# EAGLE board source_eagle (EAGLE 9.6.2)
REV: F
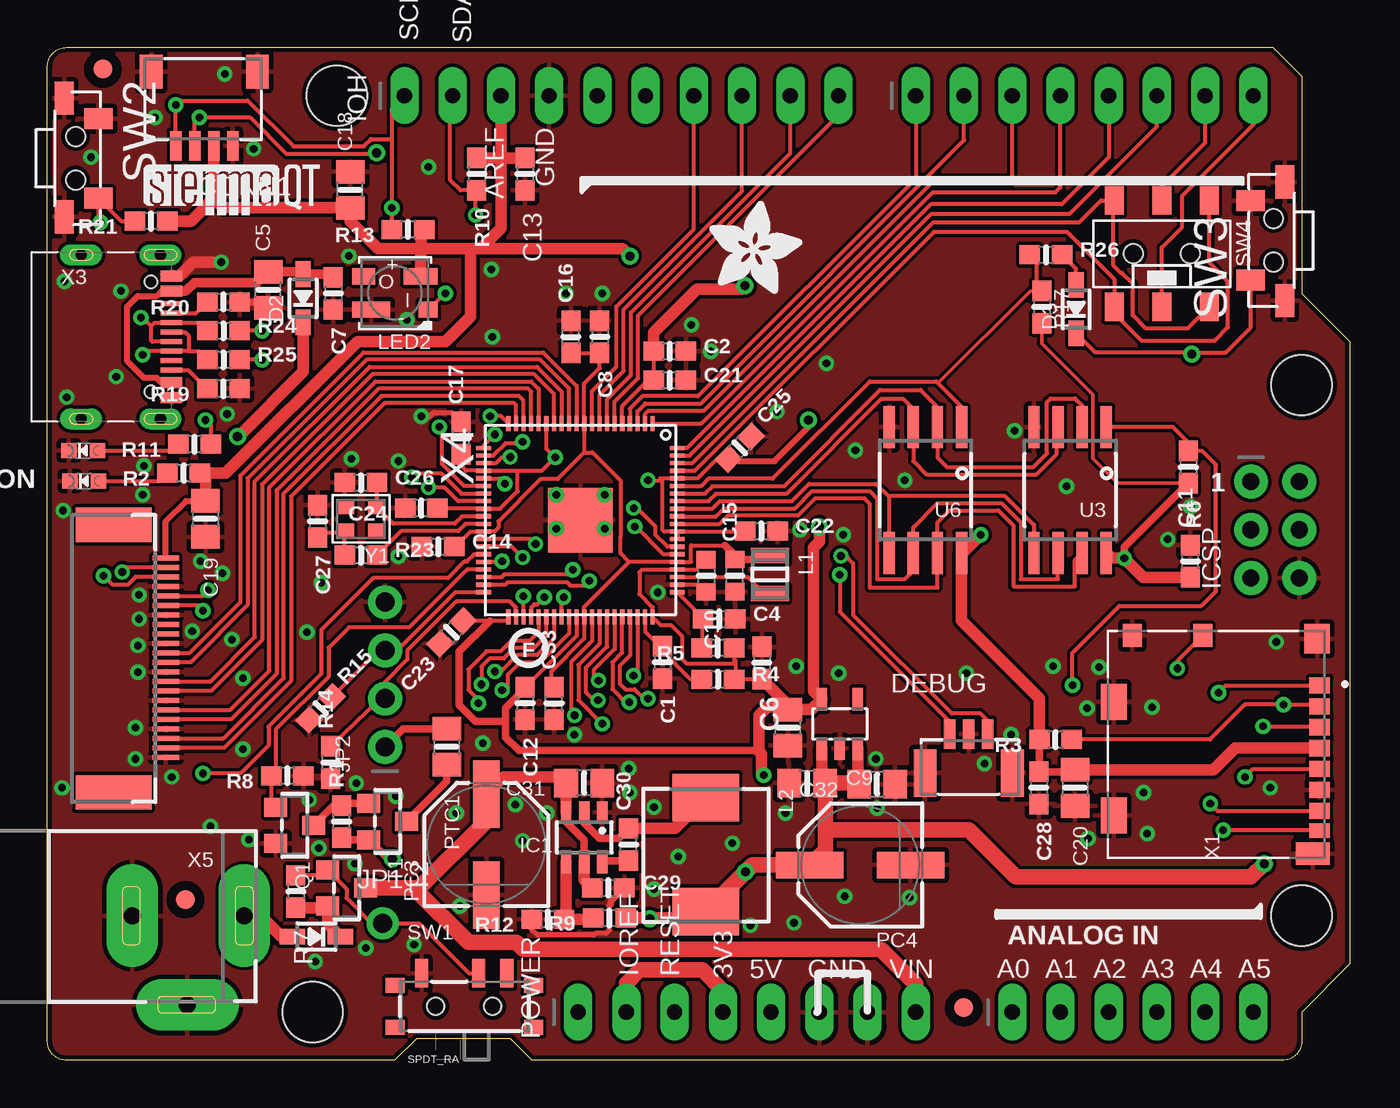
[diagram p0: board, top side]
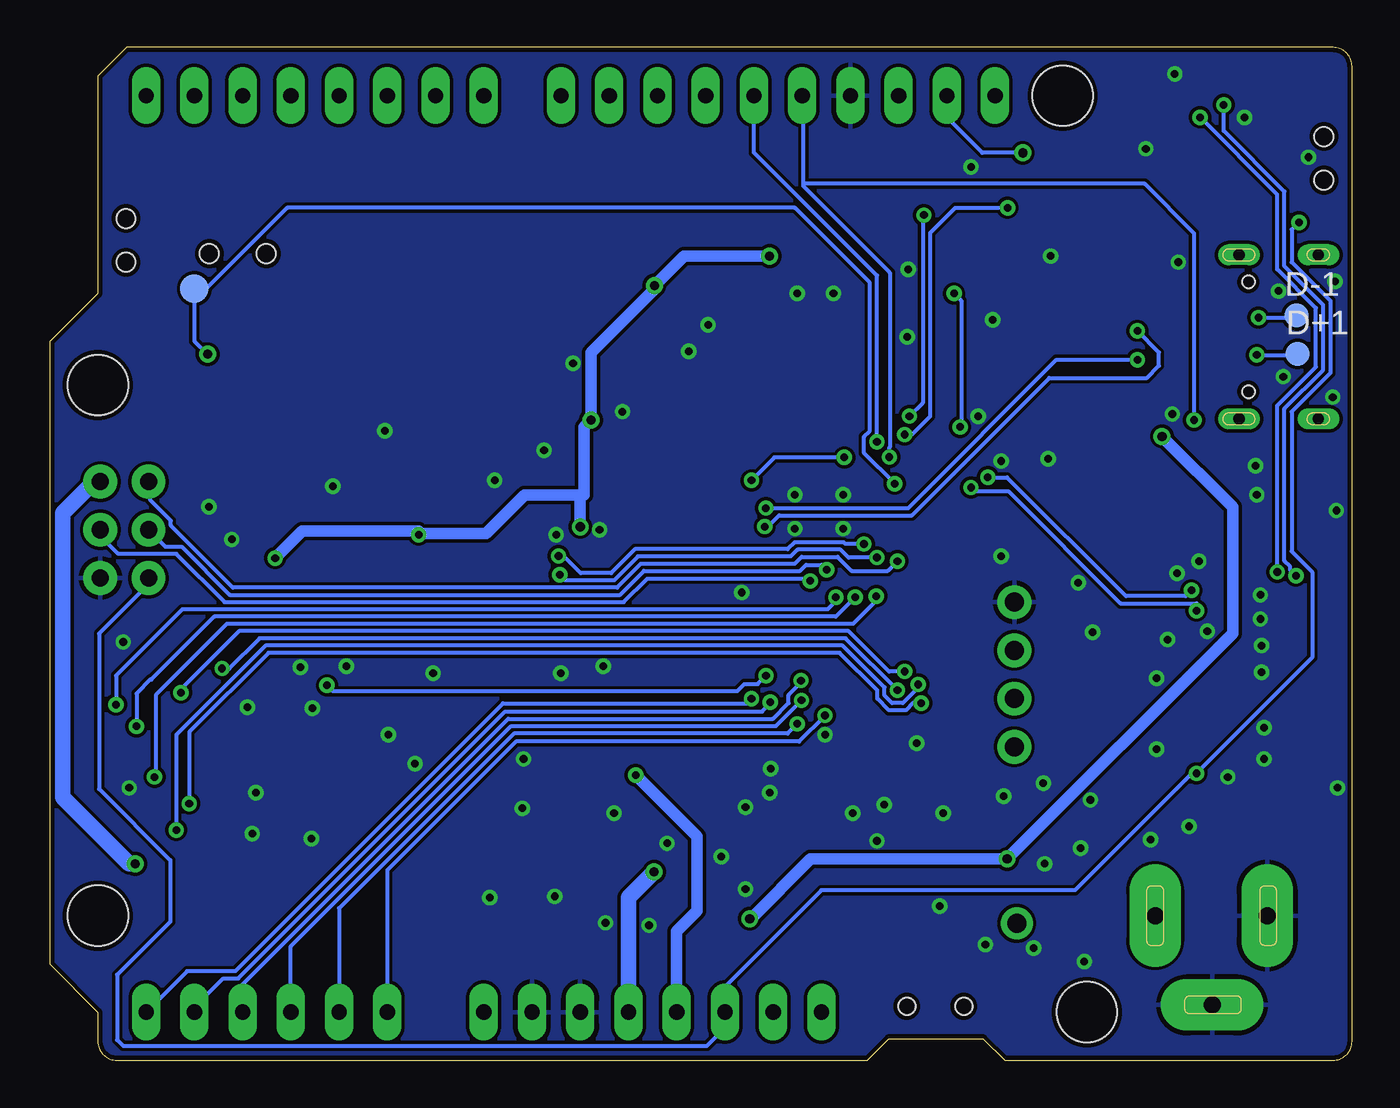
[diagram p1: board, bottom side, seen from below]

Size 68.58 x 53.34 mm. Coordinates in mm from the lower left corner, seen from the top.
Outline: 64.52,53.34 66.04,51.82 66.04,40.39 68.58,37.85 68.58,5.08 66.04,2.54 66.04,1 arc-90 65.04,0 25.53,0 24.38,1.14 19.43,1.14 18.29,0 1,0 arc-90 0,1 0,52.34 arc-90 1,53.34 64.52,53.34
Copper layers (1*16): Top 0.035mm / dielectric 1.5mm / Bottom 0.035mm
Design rules "adafruit 7-7": minimum track width 7mil, minimum drill 15.5mil, track to track 7mil, track to pad 7mil, pad to pad 7mil, via to via 7mil, smd to smd 7mil, copper to edge 10mil, drill to drill 8mil, minimum pad ring 10mil, minimum via ring 8mil, stop-mask expansion 2mil, vias tented up to drill 20mil, thermal gap 10mil
Net classes: 1 power: width 0.305 mm; 3 HIGHPOWER: width 0.254 mm, drill 0.483 mm; 4 LOWPOWER: width 0.254 mm
Holes 3.17 mm at 66.04,35.56 66.04,7.62 15.24,50.8 13.97,2.54

## Footprints (pad centres in the part's own frame; a part is rotated, then mirrored left to right if it is on the bottom)
1X06_OVALWAVE = drill 0.8 pad 1.5 long: 1 -6.35,0; 2 -3.81,0; 3 -1.27,0; 4 1.27,0; 5 3.81,0; 6 6.35,0
0603-NO = smd 1.075 x 1: 1 -0.85,0; 2 0.85,0
0805-NO = smd 1.24 x 1.5: 1 -0.95,0; 2 0.95,0
0603-NO_WIDE = smd 0.9 x 1: 1 -0.85,0; 2 0.85,0
FPC_22PIN = smd 0.25 x 1.4: 1 -5.25,-1.154; 2 -4.75,-1.154; 3 -4.25,-1.154; 4 -3.75,-1.154; 5 -3.25,-1.154; 6 -2.75,-1.154; 7 -2.25,-1.154; 8 -1.75,-1.154; 9 -1.25,-1.154; 10 -0.75,-1.154; 11 -0.25,-1.154; 12 0.25,-1.154; 13 0.75,-1.154; 14 1.25,-1.154; 15 1.75,-1.154; 16 2.25,-1.154; 17 2.75,-1.154; 18 3.25,-1.154; 19 3.75,-1.154; 20 4.25,-1.154; 21 4.75,-1.154; 22 5.25,-1.154 | smd 1.8 x 4: SUPPORT1 7,1.598; SUPPORT2 -7.1,1.598
JST_SH4 = smd 0.6 x 1.55: 1 -1.5,2.006; 2 -0.5,2.006; 3 0.5,2.006; 4 1.5,2.006 | smd 1.2 x 1.8: MT1 -2.8,-1.894; MT2 2.8,-1.894
SOD-323 = smd 1.35 x 0.8: A 1.27,0; C -1.27,0
B1,27 = smd 1.27 x 1.27: TP 0,0
JST_SH3_RA = smd 0.6 x 1.55: 1 1,0.924; 2 0,0.924; 3 -1,0.924 | smd 1.2 x 2.5: MT1 -2.3,-1.124; MT2 2.3,-1.124
FIDUCIAL_1MM = smd 1 x 1: 1 0,0
SOT23-6 = smd 0.55 x 1.2: 1 -0.95,-1.3; 2 0,-1.3; 3 0.95,-1.3; 4 0.95,1.3; 5 0,1.3; 6 -0.95,1.3
2X03_ROUND_70MIL = drill 0.9 pad 1.778: 1 -2.54,-1.27; 2 -2.54,1.27; 3 0,-1.27; 4 0,1.27; 5 2.54,-1.27; 6 2.54,1.27
1X10_OVALWAVE = drill 0.8 pad 1.5 long: 1 -11.43,0; 2 -8.89,0; 3 -6.35,0; 4 -3.81,0; 5 -1.27,0; 6 1.27,0; 7 3.81,0; 8 6.35,0; 9 8.89,0; 10 11.43,0
1X08_OVALWAVE = drill 0.8 pad 1.5 long: 1 -8.89,0; 2 -6.35,0; 3 -3.81,0; 4 -1.27,0; 5 1.27,0; 6 3.81,0; 7 6.35,0; 8 8.89,0
1X01_ROUND = drill 1 pad 1.676: 1 0,0
1X04_ROUND = drill 1 pad 1.778: 1 -3.81,0; 2 -1.27,0; 3 1.27,0; 4 3.81,0
CHIPLED_0603_NOOUTLINE = smd 0.8 x 0.8: A 0,-0.75; C 0,0.75
INDUCTOR_1007 = smd 0.8 x 2: P$1 -1,0; P$2 1,0
INDUCTOR_0603S = smd 2.5 x 3.5: P$1 -3.05,0; P$2 2.95,0
LED3535_FULLPADS = smd 1 x 0.85: 1 -1.75,0.875 | smd 1.8 x 0.85: 2 -1.35,-0.875 | smd 1.2 x 0.85: 3 1.65,-0.875 | smd 2 x 0.85: 4 1.25,0.875
PANASONIC_D = smd 3.556 x 1.4: + 2.654,0; - -2.654,0
SOT23-WIDE = smd 1 x 1.2: 1 -0.95,-1; 2 0.95,-1; 3 0,1
SPDT_SMT_SSSS811101 = smd 0.7 x 1.5: A -2.25,1.242; B 0.75,1.242; C 2.25,1.242 | smd 1 x 0.8: SUP1 -3.65,0.592; SUP2 -3.65,-1.608; SUP3 3.65,0.592; SUP4 3.65,-1.608 | hole 0.9: -1.5,-0.508; 1.5,-0.508
SPST_TACTILE_RA = smd 1.1 x 1.5: 1 2.1,-0.9; 2 -2.1,-0.9 | smd 1.75 x 1: MT1 3.175,0.9; MT2 -3.075,0.9 | hole 1: 1.15,0.3; -1.15,0.3
EG1390 = smd 1 x 1.5: O1 -2.5,2.8; O2 -2.5,-2.8; P1 0,2.8; P2 0,-2.8; S1 2.5,2.8; S2 2.5,-2.8 | hole 1: 1.5,0; -1.5,0
TESTPOINT_ROUND_1.5MM_NO = smd 1.5 x 1.5: P$1 0,0
SOT23-DBV = smd 0.55 x 1.2: 1 -0.95,-1.3; 2 0,-1.3; 3 0.95,-1.3; 4 0.95,1.3; 5 -0.95,1.3
SOIC8_208MIL = smd 0.6 x 2.2: 1 -1.905,-3.315; 2 -0.635,-3.315; 3 0.635,-3.315; 4 1.905,-3.315; 5 1.905,3.315; 6 0.635,3.315; 7 -0.635,3.315; 8 -1.905,3.315
MOLEX_104031-0811 = smd 0.85 x 1.1: 1 3.105,-5.45; 2 2.005,-5.45; 3 0.905,-5.45; 4 -0.195,-5.45; 5 -1.295,-5.45; 6 -2.395,-5.45; 7 -3.495,-5.45 | smd 0.75 x 1.1: 8 -4.545,-5.45 | smd 1.2 x 1: 9 5.74,0.7; 10 5.74,4.4 | smd 1.55 x 1.35: G1 5.565,-5.325 | smd 1.17 x 1.8: G2 -5.755,-5.1 | smd 1.9 x 1.35: G3 -3.73,5.375; G4 2.24,5.375
USB_C_CUSB31-CFM2AX-01-X = smd 0.575 x 1.15: A1B12 -3.2,2.275; A4B9 -2.4,2.275; B1A12 3.2,2.275; B4A9 2.4,2.275 | smd 0.275 x 1.15: A5 -1.25,2.275; A6 -0.25,2.275; A7 0.25,2.275; A8 1.25,2.275; B5 1.75,2.275; B6 0.75,2.275; B7 -0.75,2.275; B8 -1.75,2.275 | drill 0.6 pad 1 long: M1 -4.32,1.7; M2 4.32,1.7; M3 -4.32,-2.48; M4 4.32,-2.48 | hole 0.65: 2.89,1.2; -2.89,1.2
QFN80 = smd 0.78 x 0.22: 1 -5.09,3.8; 2 -5.09,3.4; 3 -5.09,3; 4 -5.09,2.6; 5 -5.09,2.2; 6 -5.09,1.8; 7 -5.09,1.4; 8 -5.09,1; 9 -5.09,0.6; 10 -5.09,0.2; 11 -5.09,-0.2; 12 -5.09,-0.6; 13 -5.09,-1; 14 -5.09,-1.4; 15 -5.09,-1.8; 16 -5.09,-2.2; 17 -5.09,-2.6; 18 -5.09,-3; 19 -5.09,-3.4; 20 -5.09,-3.8; 41 5.1,-3.8; 42 5.1,-3.4; 43 5.1,-3; 44 5.1,-2.6; 45 5.1,-2.2; 46 5.1,-1.8; 47 5.1,-1.4; 48 5.1,-1; 49 5.1,-0.6; 50 5.1,-0.2; 51 5.1,0.2; 52 5.1,0.6; 53 5.1,1; 54 5.1,1.4; 55 5.1,1.8; 56 5.1,2.2; 57 5.1,2.6; 58 5.1,3; 59 5.1,3.4; 60 5.1,3.8 | smd 0.22 x 0.78: 21 -3.8,-5.1; 22 -3.4,-5.1; 23 -3,-5.1; 24 -2.6,-5.1; 25 -2.2,-5.1; 26 -1.8,-5.1; 27 -1.4,-5.1; 28 -1,-5.1; 29 -0.6,-5.1; 30 -0.2,-5.1; 31 0.2,-5.1; 32 0.6,-5.1; 33 1,-5.1; 34 1.4,-5.1; 35 1.8,-5.1; 36 2.2,-5.1; 37 2.6,-5.1; 38 3,-5.1; 39 3.4,-5.1; 40 3.8,-5.1; 61 3.8,5.1; 62 3.4,5.1; 63 3,5.1; 64 2.6,5.1; 65 2.2,5.1; 66 1.8,5.1; 67 1.4,5.1; 68 1,5.1; 69 0.6,5.1; 70 0.2,5.1; 71 -0.2,5.1; 72 -0.6,5.1; 73 -1,5.1; 74 -1.4,5.1; 75 -1.8,5.1; 76 -2.2,5.1; 77 -2.6,5.1; 78 -3,5.1; 79 -3.4,5.1; 80 -3.8,5.1 | smd 3.4 x 3.4: MNT 0,0
DCJACK_2MM_PTH = drill 0.9 pad 2.7 long: GND -2.9,2.54; GNDBREAK 0,-2.16; PWR 3,2.54
CRYSTAL_2.5X2 = smd 0.9 x 0.75: 1 -0.825,-0.625; 2 0.825,-0.625; 3 0.825,0.625; 4 -0.825,0.625

## Placement (x,y rotation side)
AD  20609  [1X06_OVALWAVE]  57.15,2.54 0 top
C1  2.2uF  [0603-NO]  32.38,20.95 270 top
C2  1uF  [0603-NO]  32.77,37.34 0 top
C3  10uF  [0805-NO]  38.99,17.53 90 top
C4  2.2uF  [0603-NO]  35.37,23.24 0 top
C5  10uF  [0805-NO]  11.62,40.58 90 top
C6  0.1uF  [0603-NO]  37.62,20.93 270 top
C7  0.1uF  [0603-NO]  15.05,40.39 270 top
C8  0.1uF  [0603-NO]  29.08,38.1 270 top
C9  10uF  [0805-NO]  40.01,14.61 0 top
C10  10uF_0603  [0603-NO_WIDE]  34.68,25.51 270 top
C11  1uF  [0603-NO]  60.19,26.28 90 top
C12  1uF  [0603-NO]  25.15,18.8 270 top
C13  0.1uF  [0603-NO]  25.15,46.67 270 top
C14  0.1uF  [0603-NO]  20.57,27.05 0 top
C15  10uF_0603  [0603-NO_WIDE]  36.2,25.53 90 top
C16  1uF  [0603-NO]  27.56,38.1 90 top
C17  0.1uF  [0603-NO]  21.78,32.77 90 top
C18  10uF  [0805-NO]  15.94,45.85 90 top
C19  10uF  [0805-NO]  8.32,28.51 270 top
C20  10uF  [0805-NO]  54.1,14.35 270 top
C21  0.1uF  [0603-NO]  32.77,35.81 0 top
C22  0.1uF  [0603-NO]  37.59,27.88 0 top
C23  0.1uF  [0603-NO]  21.27,22.54 225 top
C24  0.1uF  [0603-NO]  19.68,29.08 180 top
C25  0.1uF  [0603-NO]  36.45,32.26 45 top
C26  15pF  [0603-NO]  16.51,30.42 0 top
C27  15pF  [0603-NO]  14.22,28.38 270 top
C28  1uF  [0603-NO]  52.2,14.35 270 top
C29  0.1uF  [0603-NO]  29.53,9.08 0 top
C30  0.1uF  [0603-NO]  30.61,11.37 90 top
C31  10uF  [0805-NO]  28.26,14.61 180 top
C32  10uF  [0805-NO]  43.69,14.54 180 top
C33  0.1uF  [0603-NO]  26.67,18.8 90 top
CN1  22p BOTTOM 0.5mm FPC  [FPC_22PIN]  5.08,21.21 90 top
CONN1  STEMMA_I2C_QT  [JST_SH4]  8.26,50.16 180 top
D1  PMEG2020  [SOD-323]  14.16,6.52 180 top
D2  PMEG2020  [SOD-323]  13.46,40.13 90 top
D3  1N4148  [SOD-323]  54.17,39.56 90 top
D+1  TPB1,27  [B1,27]  2.86,37.21 0 bottom
D-1  TPB1,27  [B1,27]  2.92,39.24 0 bottom
DEBUG  JST_SH3  [JST_SH3_RA]  48.51,16.26 0 top
FD1  FIDUCIAL_1MM  [FIDUCIAL_1MM]  2.92,52.2 0 top
FD2  FIDUCIAL_1MM  [FIDUCIAL_1MM]  48.25,2.77 0 top
FD3  FIDUCIAL_1MM  [FIDUCIAL_1MM]  7.26,8.46 0 top
IC1  TPS563201  [SOT23-6]  28.26,11.75 180 top
ICSP  3x2 M  [2X03_ROUND_70MIL]  64.64,27.94 270 top
IOH  20611  [1X10_OVALWAVE]  30.23,50.8 0 top
IOL  20610  [1X08_OVALWAVE]  54.61,50.8 0 top
JP1  [1X01_ROUND]  17.65,7.21 0 top
JP2  [1X04_ROUND]  17.78,20.32 90 top
L  RED  [CHIPLED_0603_NOOUTLINE]  1.88,32.11 90 top
L1  DFE252012F-3R3M=P2  [INDUCTOR_1007]  38.04,25.59 270 top
L2  3.3uH 5A 20mOhm  [INDUCTOR_0603S]  34.67,10.79 270 top
LED2  WS2812B_3535FULL  [LED3535_FULLPADS]  18.3,40.41 180 top
ON  GREEN  [CHIPLED_0603_NOOUTLINE]  1.93,30.51 90 top
PC3  47uF/25V  [PANASONIC_D]  23.11,11.37 90 top
PC4  220uF/6.3V  [PANASONIC_D]  42.8,10.29 180 top
PLABEL0  [PLABEL0]  57.91,26.48 90 top
PLABEL1  [PLABEL1]  50.29,26.67 90 top
PLABEL2  [PLABEL2]  14.54,42.93 0 top
PLABEL3  [PLABEL3]  8.06,23.3 90 top
PLABEL4  [PLABEL4]  16.07,16.07 90 top
PLABEL5  [PLABEL5]  16.07,18.67 90 top
PLABEL6  [PLABEL6]  16.07,21.21 90 top
PLABEL7  [PLABEL7]  16.07,24.19 90 top
PLABEL8  [PLABEL8]  19.37,20.07 90 top
PLABEL10  [PLABEL10]  30.48,4.45 90 top
PLABEL11  [PLABEL11]  31.56,5.08 0 top
PLABEL12  [PLABEL12]  35.56,4.32 90 top
PLABEL13  [PLABEL13]  38.1,4.32 90 top
PLABEL14  [PLABEL14]  39.94,5.65 0 top
PLABEL15  [PLABEL15]  45.72,4.25 90 top
PLABEL16  [PLABEL16]  50.8,4.51 90 top
PLABEL17  [PLABEL17]  53.34,4.51 90 top
PLABEL18  [PLABEL18]  55.88,4.51 90 top
PLABEL19  [PLABEL19]  58.42,4.51 90 top
PLABEL20  [PLABEL20]  60.96,4.51 90 top
PLABEL21  [PLABEL21]  63.5,4.57 90 top
PLABEL22  [PLABEL22]  50.04,9.27 0 top
PLABEL23  [PLABEL23]  56.58,9.65 0 top
PLABEL24  [PLABEL24]  61.47,30.04 90 top
PLABEL25  [PLABEL25]  61.53,26.35 90 top
PLABEL26  [PLABEL26]  61.53,23.18 90 top
PLABEL27  [PLABEL27]  67.69,24.26 90 top
PLABEL28  [PLABEL28]  67.63,26.48 90 top
PLABEL29  [PLABEL29]  67.69,30.16 90 top
PLABEL30  [PLABEL30]  55.75,38.23 0 top
PLABEL31  [PLABEL31]  55.69,36.83 0 top
PLABEL32  [PLABEL32]  60.83,36.83 0 top
PLABEL33  [PLABEL33]  60.83,38.23 0 top
PLABEL34  [PLABEL34]  57.72,38.23 0 top
PLABEL35  [PLABEL35]  57.72,36.83 0 top
PLABEL36  [PLABEL36]  63.44,38.35 0 top
PLABEL37  [PLABEL37]  28.07,44.64 0 top
PLABEL38  [PLABEL38]  45.91,19.05 0 top
PLABEL39  [PLABEL39]  4.25,45.02 90 top
PLABEL40  [PLABEL40]  18.73,49.09 90 top
PLABEL41  [PLABEL41]  21.34,49.02 90 top
PLABEL42  [PLABEL42]  23.88,49.02 90 top
PLABEL43  [PLABEL43]  26.42,48.96 90 top
PLABEL46  [PLABEL46]  34.04,49.21 90 top
PLABEL47  [PLABEL47]  36.58,49.09 90 top
PLABEL48  [PLABEL48]  39.12,49.09 90 top
PLABEL49  [PLABEL49]  41.66,49.09 90 top
PLABEL50  [PLABEL50]  45.72,49.09 90 top
PLABEL51  [PLABEL51]  48.26,49.09 90 top
PLABEL52  [PLABEL52]  50.8,49.09 90 top
PLABEL53  [PLABEL53]  53.34,49.09 90 top
PLABEL54  [PLABEL54]  55.88,49.09 90 top
PLABEL55  [PLABEL55]  58.42,49.09 90 top
PLABEL56  [PLABEL56]  60.96,49.21 90 top
PLABEL57  [PLABEL57]  63.5,49.21 90 top
PLABEL59  [PLABEL59]  17.08,4.64 0 top
PLABEL60  [PLABEL60]  25.02,4.57 0 top
PLABEL62  [PLABEL62]  3.3,30.1 0 top
PLABEL63  [PLABEL63]  28.96,49.15 90 top
PLABEL64  [PLABEL64]  31.5,49.21 90 top
PLABEL65  [PLABEL65]  3.11,31.62 0 top
PLABEL66  [PLABEL66]  2.67,1.65 0 top
PLABEL67  [PLABEL67]  8.7,14.29 0 top
PLABEL68  [PLABEL68]  11.11,1.65 0 top
PLABEL69  [PLABEL69]  47.24,22.99 0 top
PLABEL70  [PLABEL70]  23.37,30.42 0 bottom
POWER  20610  [1X08_OVALWAVE]  36.83,2.54 0 top
PTC1  5V/1A  [0805-NO]  21.02,16.51 270 top
Q1  BSS138  [SOT23-WIDE]  13.02,12.38 270 top
R1  10K  [0603-NO]  15.49,12.57 90 top
R2  10K  [0603-NO]  7.18,30.92 180 top
R3  10K  [0603-NO]  53.09,16.89 180 top
R4  200  [0603-NO]  35.31,20.07 0 top
R5  10  [0603-NO]  35.31,21.72 180 top
R6  10K  [0603-NO]  60.07,31.24 270 top
R7  10K  [0603-NO]  13.08,8.89 270 top
R8  10K  [0603-NO]  12.64,14.99 180 top
R9  56K  [0603-NO]  29.59,7.49 180 top
R10  10K  [0603-NO]  22.61,46.67 270 top
R11  2.2K  [0603-NO]  7.75,32.45 180 top
R12  10K  [0603-NO]  26.35,7.43 180 top
R13  10K  [0603-NO]  18.99,43.75 180 top
R14  DNP  [0603-NO]  14.92,15.68 90 top
R15  DNP  [0603-NO]  14.39,18.54 45 top
R17  10K  [0603-NO]  52.35,39.67 270 top
R19  5.1K  [0603-NO]  9.27,35.37 180 top
R20  5.1K  [0603-NO]  9.27,39.94 180 top
R21  10K  [0603-NO]  5.46,44.2 180 top
R23  1K  [0603-NO]  16.51,26.61 0 top
R24  22 ohm  [0603-NO]  9.27,38.42 0 top
R25  22 ohm  [0603-NO]  9.27,36.89 0 top
R26  1K  [0603-NO]  52.58,42.42 0 top
SW1  SPDT_RA  [SPDT_SMT_SSSS811101]  21.95,3.35 0 top
SW2  SW_RA  [SPST_TACTILE_RA]  1.78,47.5 90 top
SW3  SW_RA  [SPST_TACTILE_RA]  64.26,43.18 270 top
SW4  DPDT  [EG1390]  58.67,42.48 180 top
T1  DMP3098L  [SOT23-WIDE]  17.91,12.57 270 top
T2  DMP3098L  [SOT23-WIDE]  15.75,9.08 270 top
TP1  [TESTPOINT_ROUND_1.5MM_NO]  60.96,40.64 0 bottom
U2  AP2112K-3.3  [SOT23-DBV]  41.72,17.72 0 top
U3  DNP  [SOIC8_208MIL]  53.85,30.04 180 top
U6  W25Q128  [SOIC8_208MIL]  46.23,30.04 180 top
U$3  [STEMMAQT]  5.08,44.51 0 top
U$11  [PCBFEAT-REV-040]  25.34,21.72 0 top
U$47  [METRO_RP2350_TOP]  0,0 0 top
U$50  [ADAFRUIT_5MM]  34.86,40.39 0 top
U$71  [METRO_RP2350_BOT]  68.58,0 0 bottom
X1  MICROSD  [MOLEX_104031-0811]  61.53,16.64 90 top
X3  USB Type C  [USB_C_CUSB31-CFM2AX-01-X]  4.25,38.1 270 top
X4  RP2350B  [QFN80]  28.07,28.45 270 top
X5  2.1mm  [DCJACK_2MM_PTH]  7.37,5.08 0 top
Y1  12MHz_10pF_50ohm  [CRYSTAL_2.5X2]  16.51,28.51 180 top

## Library data of the parts
AD ICSP IOH IOL POWER = microbuilder; FORCETHM: 1
C1-C33 D1-D3 JP1 JP2 L1 L2 PTC1 R1-R15 R17 R19-R21 R23-R26 TP1 U3 U6 U$50 Y1 = microbuilder
CN1 DEBUG SW1 X1 = adafruit_electromech
CONN1 = adafruit_electromech; LCSC: C2845363
D+1 D-1 = testpad
FD1-FD3 = microbuilder; BOM: EXCLUDE
IC1 = adafruit_power; ROT: 270
L ON Q1 T1 T2 = microbuilder; ROT: 270
LED2 PC3 PC4 = microbuilder; ROT: 180
PLABEL0 PLABEL1-PLABEL8 PLABEL10-PLABEL43 PLABEL46-PLABEL57 PLABEL59 PLABEL60 PLABEL62-PLABEL70 = pinguin
SW2 SW3 = adafruit_electromech; LCSC: C778159
SW4 = adafruit_electromech; LCSC: C2837066
U2 = SmartPrj
U$3 = silks
U$11 = microbuilder; REV: F
U$47 U$71 = metro_silks
X3 = adafruit_electromech; LCSC: C165948
X4 = adafruit_micro
X5 = adafruit_electromech; FORCETHM: 1

## Nets
1.2V: C8.2 C14.2 C15.2 C16.1 C33.2 L1.P$1 X4.10 X4.32 X4.51 X4.65
3.3V: C2.1 C3.2 C6.2 C10.1 C11.1 C12.1 C13.1 C17.1 C18.1 C19.1 C20.1 C21.1 C22.1 C23.1 C24.1 C25.1 C28.1 CN1.22 CONN1.2 IOH.3 LED2.2 POWER.2 POWER.4 R2.1 R3.2 R4.2 R5.1 R6.2 R10.1 R13.1 R17.2 R21.1 U2.5 U3.8 U6.8 X1.4 X4.5 X4.15 X4.24 X4.29 X4.41 X4.50 X4.60 X4.64 X4.68 X4.69 X4.76
!RESET: ICSP.5 POWER.3 R21.2 SW2.2 X4.35
+5V [HIGHPOWER]: C9.2 C32.2 D2.C ICSP.2 L2.P$2 PC4.+ POWER.5 R1.1 R9.1 T1.2 U2.1 U2.3
A0: AD.1 X4.52
A1: AD.2 X4.53
A2: AD.3 X4.54
A3: AD.4 X4.55
A4: AD.5 X4.56
A5: AD.6 X4.57
ADC_AVDD: C1.1 R4.1 X4.59
CC1: R20.2 X3.A5
CC2: R19.2 X3.B5
D0: SW4.O2 SW4.S1 X4.77
D1: SW4.O1 SW4.S2 X4.78
D2: IOL.6 X4.79
D3: IOL.5 X4.80
D4: IOL.4 X4.1
D5: IOL.3 X4.2
D6: IOL.2 X4.3
D7: IOL.1 X4.4
D8: IOH.10 X4.6
D9: IOH.9 X4.7
D10: IOH.8 X4.8
D11: IOH.7 X4.9
D22: IOH.6 X4.22
D23: IOH.5 R11.1 X4.23
D+: R25.2 X4.67
D-: R24.2 X4.66
GND: C1.2 C2.2 C3.1 C4.2 C5.1 C6.1 C7.2 C8.1 C9.1 C10.2 C11.2 C12.2 C13.2 C14.1 C15.1 C16.2 C17.2 C18.2 C19.2 C20.2 C21.2 C22.2 C23.2 C24.2 C25.2 C26.1 C27.1 C28.2 C29.2 C31.1 C32.1 C33.1 CN1.1 CN1.4 CN1.7 CN1.10 CN1.13 CN1.16 CN1.19 CONN1.1 CONN1.MT1 CONN1.MT2 DEBUG.2 DEBUG.MT1 DEBUG.MT2 IC1.1 ICSP.6 IOH.4 JP2.4 L.C LED2.4 ON.C PC3.- PC4.- POWER.6 POWER.7 Q1.2 R8.1 R12.2 R14.1 R15.1 R19.1 R20.1 SW1.A SW2.1 SW2.MT1 SW2.MT2 SW3.2 SW3.MT1 SW3.MT2 U2.2 U3.4 U6.4 X1.6 X1.10 X1.G1 X1.G2 X1.G3 X1.G4 X3.A1B12 X3.B1A12 X4.62 X4.MNT X5.GND X5.GNDBREAK
GPIO26: CN1.18 X4.27
GPIO27: CN1.17 X4.28
HSTX12: CN1.12 X4.11
HSTX13: CN1.11 X4.12
HSTX14: CN1.9 X4.13
HSTX15: CN1.8 X4.14
HSTX16: CN1.6 X4.16
HSTX17: CN1.5 X4.17
HSTX18: CN1.3 X4.18
HSTX19: CN1.2 X4.19
LX: L1.P$2 X4.63
MISO: ICSP.1 X4.36
MISO/SDIO_DAT0: X1.7 X4.45
MOSI: ICSP.4 X4.39
MOSI/SDIO_CMD: X1.3 X4.44
N$1: L.A R11.2
N$2: ON.A R2.2
N$3: JP2.1 PTC1.1
N$4: PTC1.2 T1.3
N$5: Q1.3 R1.2 T1.1
N$6: D3.A R26.2
N$7: C30.1 IC1.6
N$8: IC1.4 R9.2 R12.1
N$10: C27.2 R23.1 Y1.3
N$15: D1.C R7.2 T2.2
NEOPIX: LED2.1 X4.26
PSRAM_CS: R6.1 U3.1 X4.58
PWR_SWITCH: JP1.1 R7.1 SW1.B T2.1
PWRIN [HIGHPOWER]: D1.A X5.PWR
QSPI_CS: R17.1 R26.1 U6.1 X4.75
QSPI_DATA[0]: U3.5 U6.5 X4.72
QSPI_DATA[1]: U3.2 U6.2 X4.74
QSPI_DATA[2]: U3.3 U6.3 X4.73
QSPI_DATA[3]: U3.7 U6.7 X4.70
QSPI_SCK: U3.6 U6.6 X4.71
RXD: IOL.8 SW4.P1
SCK: ICSP.3 X4.38
SCK/SDIO_CLK: X1.5 X4.43
SCL: CN1.20 CONN1.4 IOH.1 R13.2 X4.21
SD_DETECT: X1.9 X4.49
SDA: CN1.21 CONN1.3 IOH.2 R10.2 X4.20
SDCS/SDIO_DAT3: R3.1 X1.2 X4.48
SDIO_DAT1: X1.8 X4.46
SDIO_DAT2: X1.1 X4.47
SW: C30.2 IC1.2 L2.P$1
SWCLK: DEBUG.1 X4.33
SWDIO: DEBUG.3 X4.34
TXD: IOL.7 SW4.P2
USB_D+: D+1.TP R25.1 X3.A6 X3.B6
USB_D-: D-1.TP R24.1 X3.A7 X3.B7
USBBOOT: D3.C SW3.1 TP1.P$1 X4.25
USBH_D+: JP2.3 R15.2 X4.40
USBH_D-: JP2.2 R14.2 X4.42
USBH_PWR: Q1.1 R8.2 X4.37
VBUS [HIGHPOWER]: C5.2 C7.1 D2.A X3.A4B9 X3.B4A9
VIN [HIGHPOWER]: C29.1 C31.2 IC1.3 IC1.5 PC3.+ POWER.8 T2.3
VREG_AVDD: C4.1 R5.2 X4.61
XIN: C26.2 X4.30 Y1.1
XOUT: R23.2 X4.31

## Tracks (layer width: path | path; a pad name or v marks a point on that pad's centre or on a via)
1.2V
  Top 0.203: 29.08,36.96 29.08,36.45 28.27,35.63 X4.10 28.27,32.01 | 29.08,36.96 C8.2 | C16.1 28.79,37.25 29.08,36.96 | 35.69,27.11 33.89,27.11 33.89,26.25 X4.65 30.63,26.25 | L1.P$1 37.82,26.38 | C14.2 21.49,27.05 22.29,27.85 X4.32 23.53,27.85 23.75,28.07 23.75,28.38 25.97,30.61 26.86,30.61 28.27,32.01 | 30.63,26.25 28.27,23.89 X4.51 28.27,22.21 26.54,20.49 26.54,19.77 C33.2 | 28.27,32.01 28.69,32.01 30.16,30.54 30.16,27.56 30.16,26.71 30.63,26.25
  Top 0.406: 35.69,27.11 36.2,26.61 C15.2 37.82,26.38
3.3V  (via drill 0.4, 0.48)
  Top 0.178: R17.2 52.35,37.76 55.05,35.05 55.05,31.69 56.35,30.39 R6.2
  Top 0.203: X4.5 30.27,34.45 31.63,35.81 C21.1 C2.1 | C25.1 35.24,31.66 34.24,30.66 X4.76 32.28,30.65 32.26,30.62 32.26,30.54 | X4.69 X4.68 | X4.69 36.71,27.85 C22.1 | C10.1 34.17,25.85 X4.64 31.31,25.85 31.17,25.71 31.17,24.55 31.87,23.86 X4.60 32.29,22.92 32.83,22.92 33.4,22.35 33.4,21.14 33.66,20.89 36.16,20.89 36.16,21.08 | R5.1 36.16,21.08 | C6.2 R4.2 36.22,20.13 36.22,21.08 36.16,21.08 | X4.50 27.87,22.35 25.15,19.64 C12.1 | X4.69 32.48,27.85 32.38,27.94 32.38,30.54 32.26,30.54 | X4.41 24.27,23.14 23.3,23.14 C23.1 | 24.77,31.05 X4.24 22.04,31.05 21.61,31.47 C17.1 | 24.77,31.05 26.03,31.05 v26.73,31.75 26.27,32.22 X4.15 | 24.77,31.05 24.77,29.97 23.84,29.05 X4.29 20.57,29.05 C24.1 | v31.62,30.54 32.26,30.54
  Top 0.305: CN1.22 6.23,28.39 7.3,29.46 C19.1 | C25.1 35.95,31.56 38.29,31.56 40.07,33.34 v40.07,33.72
  Top 0.406: 23.88,47.65 23.75,47.52 | C20.1 54,15.2 C28.1 52.24,15.24 R3.2 | R6.2 56.71,27.03 v56.71,26.45 | C12.1 25.15,19.58 24.13,18.57 24.13,17.84 | 37.59,16.13 37.47,16.26 37.4,16.32 24.83,16.32 24.13,17.02 24.13,17.84 | 19.65,42.43 19.82,42.6 19.68,42.74 | 24.13,17.84 22.54,17.84 21.68,18.71 21.68,21.52 23.3,23.14
  Top 0.61: R21.1 7.56,44.2 8.76,45.4 | CONN1.2 8.76,45.4 | 8.76,45.4 9.25,44.9 C18.1 15.94,44.2 17.4,42.74 19.68,42.74 | LED2.2 19.65,42.43 | R10.1 23.75,47.52 C13.1 | IOH.3 23.88,47.65 23.88,43.81 22.8,42.74 | C19.1 8.32,30.63 R2.1 9.38,30.92 16.32,37.86 20.97,37.86 22.29,39.18 22.29,42.74 | C3.2 40.23,18.48 U2.5 40.33,19.46 40.33,27.02 40.64,27.33 v40.64,28.1 | 22.8,42.74 22.29,42.74 | 22.29,42.74 19.68,42.74 | C6.2 38.99,18.71 C3.2 | C11.1 57.71,25.43 v56.71,26.44 v56.71,26.45 56.03,26.45 U3.8 | v49.15,27.69 48.18,26.72 U6.8 48.13,23.15 52.24,19.05 R3.2 | 37.59,16.13 37.59,15.15 v37.72,15.02 | 37.47,16.26 37.47,18.16 37.91,18.61 38.86,18.61 C3.2 | X1.4 62.54,16.44 61.4,15.3 C20.1 | 22.8,42.74 30.29,42.74 v30.67,42.35 | C2.1 31.92,38.33 34.2,40.61 36.54,40.61 v36.73,40.8 | R13.1 19.68,43.6 19.68,42.74
  Top 0.813: POWER.2 30.48,4.06 31.18,4.76 34.48,4.76 35.62,3.62 35.62,2.6 POWER.4
  Bottom 0.203: v26.73,31.75 30.42,31.75 v31.62,30.54
  Bottom 0.61: v56.71,26.45 55.28,27.88 49.15,27.88 v49.15,27.69 49.09,27.75 45.59,27.75 43.56,29.78 40.64,29.78 | POWER.4 35.56,6.79 34.48,7.87 34.48,11.78 v37.72,15.02 | 40.64,29.78 v40.64,28.1 | v30.67,42.35 35.18,42.35 v36.73,40.8 36.73,40.61 40.07,37.27 v40.07,33.72 40.45,33.34 40.45,29.78 40.64,29.78
!RESET  (via drill 0.4)
  Top 0.203: R21.2 3.88,44.2 SW2.2 2.68,44.25 v2.79,44.13 | X4.35 22.46,26.65 22.08,26.27 21.95,26.27 21.08,25.4 17.14,25.4 14.41,22.67 14.41,20.35 11.64,17.57 11.64,16.57 10.18,15.11 v8.19,15.11
  Bottom 0.203: ICSP.5 63.37,25.08 65.98,22.48 65.98,14.29 62.23,10.54 62.23,7.3 65.02,4.51 65.02,1.08 64.7,0.76 57.99,0.76 56.31,0.76 33.97,0.76 33.02,1.71 POWER.3 33.02,3.87 27.94,8.95 14.61,8.95 8.45,15.11 v8.19,15.11 2.1,21.21 2.1,25.72 3.17,26.8 3.17,34.16 1.14,36.2 1.14,40 3.17,42.03 3.17,43.75 v2.79,44.13
+5V  (via drill 0.48)
  Top 0.406: R1.1 15.59,11.62 T1.2 17.93,10.6 v18.16,10.6 | v31.71,7.46 31.75,7.49 31.81,7.49
  Top 0.61: R9.1 31.81,7.49 34.32,7.49 L2.P$2 | U2.1 40.77,14.79 C9.2 | U2.3 42.67,14.61 | D2.C 13.46,36.26 10.06,32.86 v10.01,32.86
  Top 0.813: L2.P$2 v36.75,9.92 37.11,10.29 PC4.+ 40.95,11.1 40.95,12.13 | 40.95,12.13 C9.2 42.67,14.61 C32.2 | 40.95,12.13 48.51,12.13 50.99,9.65 63.37,9.65 v64.07,10.35
  Bottom 0.406: 31.69,7.43 v31.71,7.46
  Bottom 0.61: 31.69,7.43 28.51,10.6 v18.16,10.6 6.29,22.48 6.29,29.14 v10.01,32.86
  Bottom 0.813: POWER.5 38.1,8.57 v36.75,9.92 | ICSP.2 66.23,30.48 67.88,28.83 67.88,13.84 64.39,10.35 v64.07,10.35
A0  (via drill 0.4)
  Top 0.203: X4.52 28.67,22.07 27.57,20.98 27.57,18.34 v27.75,18.16
  Bottom 0.203: v27.75,18.16 27.73,18.16 29.12,16.78 44.02,16.78 50.8,10.01 AD.1
A1  (via drill 0.4)
  Top 0.203: X4.53 29.07,21.93 27.96,20.82 27.96,18.97 v29.21,17.72
  Bottom 0.203: v29.21,17.72 29.72,17.21 44.14,17.21 53.34,8.01 AD.2
A2  (via drill 0.4)
  Top 0.203: v28.99,18.96 28.78,18.96 28.34,19.4 28.34,20.66 29.47,21.8 X4.54
  Bottom 0.203: AD.3 55.88,6 44.28,17.61 30.34,17.61 v28.99,18.96
A3  (via drill 0.4)
  Top 0.203: v29.02,20 28.77,20.26 28.77,20.55 29.87,21.66 X4.55
  Bottom 0.203: AD.4 58.42,4 44.44,17.99 30.5,17.99 29.67,18.81 29.67,19.24 29.02,19.89 v29.02,20
A4  (via drill 0.4)
  Top 0.203: X4.56 30.27,21.47 29.75,20.95 29.75,19.56 30.45,18.86 v30.64,18.86
  Bottom 0.203: AD.5 60.96,2.79 59.44,4.32 58.64,4.32 44.59,18.37 31.07,18.37 30.64,18.8 v30.64,18.86
A5  (via drill 0.4)
  Top 0.203: X4.57 30.67,21.32 30.13,20.78 30.13,19.84 30.43,19.54 30.92,19.54 31.41,19.05 v31.62,19.05
  Bottom 0.203: v31.62,19.05 31.62,18.8 44.7,18.8 58.8,4.7 61.34,4.7 AD.6
ADC_AVDD
  Top 0.203: R4.1 33.87,20.07 32.38,21.55 C1.1 32.26,21.8 31.47,22.6 X4.59
CC1
  Top 0.203: X3.A5 7.83,39.35 R20.2
CC2
  Top 0.203: X3.B5 7.4,36.35 8.38,35.37 R19.2
D0
  Top 0.203: X4.77 34.1,31.05 46.67,43.62 53.7,43.62 56.17,41.14 SW4.S1 56.17,39.33 57.59,37.91 61.47,37.91 62.17,38.61 62.17,41.02 61.17,42.01 SW4.O2
D1
  Top 0.203: X4.78 33.96,31.45 46.64,44.13 54.33,44.13 55.48,45.28 56.13,45.28 | 56.13,45.28 SW4.S2 | SW4.O1 60.16,38.67 60.04,38.54 57.85,38.54 57.15,39.24 57.15,40.89 56.58,41.47 56.52,41.47 56.13,41.85 56.13,45.28
D2
  Top 0.203: X4.79 33.82,31.85 46.55,44.58 53.82,44.58 58.42,49.17 IOL.6
D3
  Top 0.203: IOL.5 55.88,47.56 53.4,45.09 46.52,45.09 33.68,32.25 X4.80
D4
  Top 0.203: X4.1 34.43,33.54 46.61,45.72 53.09,45.72 53.34,45.97 IOL.4
D5
  Top 0.203: X4.2 31.48,34.04 31.64,34.21 34.56,34.21 46.77,46.42 50.8,46.42 IOL.3
D6
  Top 0.203: X4.3 31.07,34.17 31.48,34.59 34.4,34.59 48.26,48.45 IOL.2
D7
  Top 0.203: IOL.1 45.72,46.44 34.25,34.97 31.33,34.97 30.67,34.31 X4.4
D8
  Top 0.203: X4.6 29.87,34.69 31.1,35.92 31.1,39.23 41.66,49.78 IOH.10
D9
  Top 0.203: X4.7 29.47,34.83 30.72,36.08 30.72,39.38 39.12,47.78 IOH.9
D10
  Top 0.203: X4.8 29.07,35.03 30.34,36.3 30.34,39.54 36.58,45.78 IOH.8
D11
  Top 0.203: X4.9 28.67,35.24 29.96,36.53 29.96,39.7 34.04,43.78 IOH.7
D22  (via drill 0.4)
  Top 0.203: X4.22 23.48,31.85 24.11,32.48 24.8,32.48 24.89,32.57 v25.02,32.57
  Bottom 0.203: v25.02,32.57 25.02,41.33 31.5,47.81 IOH.6
D23  (via drill 0.4)
  Top 0.203: X4.23 23.62,31.46 23.94,31.77 v24.36,31.77 | v8.32,33.72 8.6,33.44 R11.1
  Bottom 0.203: v24.36,31.77 24.36,32.25 24.33,32.28 24.33,41.48 28.89,46.04 28.89,46.16 | IOH.5 28.89,50.74 28.89,46.16 | v8.32,33.72 8.32,43.56 10.92,46.16 28.89,46.16
D+  (via drill 0.39)
  Top 0.203: X4.67 32.64,27.05 32,27.69 32,28.13 31.05,29.08 v30.86,29.08 | v11.3,36.89 R25.2
  Bottom 0.203: v30.86,29.08 23.37,29.08 15.56,36.89 v11.3,36.89
D-  (via drill 0.39)
  Top 0.203: X4.66 32.45,26.65 30.99,28.11 v30.92,28.11 | v11.3,38.42 R24.2
  Bottom 0.203: v30.92,28.11 30.92,28.13 30.73,28.13 30.16,28.7 23.18,28.7 15.94,35.94 10.79,35.94 10.16,36.58 10.16,37.27 v11.3,38.42
GND  (via drill 0.4)
  Top 0.203: X4.62 34.3,25.05 C10.2 | X4.MNT 28.07,28.51 v26.8,29.78
  Top 0.254: v19.68,33.91 20.13,33.91 20.34,34.12 21.27,34.12 C17.2 | 29.59,8.15 29.58,8.14 29.58,6.87 29.41,6.69 28.85,6.69 28.77,6.6 25.78,6.6 25.5,6.88 R12.2
  Top 0.305: C29.2 29.65,8.36 29.65,8.21 29.59,8.15
  Top 0.406: R20.1 11.31,39.94 C5.1
  Top 0.61: X3.A1B12 6.95,41.3 7.68,42.04 v9.14,42.04
  other vias: 29.34,29.78 32.13,24.64 39.62,27.94 39.43,20.76 27.75,17.14 30.61,15.37 30.67,14.1 26.29,13.02 22.92,16.7 24.64,13.46 21.53,13.02 31.94,13.34 31.94,9.02 33.21,10.73 36.07,11.43 38.86,13.02 45.4,8.57 41.97,8.64 39.31,7.24 37.02,7.11 25.02,11.56 21.72,8.13 16.19,10.35 14.29,11.18 13.78,13.72 16.26,14.61 18.35,13.91 16.76,5.91 14.1,5.21 19.3,6.1 43.69,13.27 43.62,15.88 41.66,20.38 49.34,15.62 41.91,27.69 50.74,17.14 48.39,20.38 52.96,20.76 54.74,18.54 55.37,20.7 58.17,18.61 57.72,14.1 57.91,11.94 54.8,11.68 64.39,14.35 64.71,22.03 60.2,29.15 58.99,27.43 53.66,30.23 45.15,30.54 42.55,32.13 50.93,33.15 38.42,34.16 34.92,37.34 33.91,38.73 29.21,40.39 27.3,40.39 16,31.69 18.48,26.54 18.48,31.56 15.88,42.35 18.92,38.99 23.37,41.66 23.43,38.1 20.07,47.05 10.86,48.01 9.33,51.94 5.65,49.66 2.29,47.56 0.89,41.02 1.02,34.92 3.62,36 3.87,40.51 5.08,31.31 26.8,28 29.34,28 9.46,34.04 4.83,24.51 4.83,23.24 4.76,21.84 7.62,22.61 8.06,26.29 4.76,20.45 9.72,22.16 10.29,20.13 4.64,17.53 4.64,15.88 6.54,14.92 13.65,22.54 14.41,25.15 9.21,25.65 5.02,29.78 0.83,28.96 0.76,14.35 8.57,12.32 10.6,11.62 41.02,36.7 10.29,16.38
  pour Top: 0,53.34 68.58,53.34 68.58,0 0,0
  pour Bottom: 0,53.34 68.58,53.34 68.58,0 0,0
GPIO26  (via drill 0.4)
  Top 0.203: v8.46,24.75 8.17,24.46 CN1.18 | v19.18,30.7 19.37,30.89 20.75,30.89 21.79,29.85 X4.27
  Bottom 0.203: v8.46,24.75 8.76,24.45 11.91,24.45 18.16,30.7 v19.18,30.7
GPIO27  (via drill 0.4)
  Top 0.203: X4.28 21.62,29.45 20.91,30.16 v20.07,30.16 | v8.19,23.69 7.92,23.96 CN1.17
  Bottom 0.203: v20.07,30.16 19.88,29.97 18.1,29.97 12.19,24.07 8.19,24.07 v8.19,23.69
HSTX12
  Top 0.203: CN1.12 7.49,21.46 10.16,24.13 10.16,30.8 16.64,37.27 26.1,37.27 27.87,35.51 X4.11
HSTX13
  Top 0.203: X4.12 27.47,35.37 25.94,36.89 16.8,36.89 10.54,30.64 10.54,23.97 7.53,20.96 CN1.11
HSTX14
  Top 0.203: CN1.9 8.59,19.96 10.92,22.29 10.92,30.48 16.95,36.51 25.79,36.51 27.07,35.23 X4.13
HSTX15
  Top 0.203: X4.14 26.67,35.09 25.63,36.13 17.11,36.13 11.3,30.32 11.3,22.13 8.63,19.46 CN1.8
HSTX16
  Top 0.203: CN1.6 9.63,18.46 11.68,20.51 11.68,30.17 17.27,35.75 25.47,35.75 25.87,35.35 X4.16
HSTX17
  Top 0.203: X4.17 25.47,35.22 25.31,35.37 17.43,35.37 12.06,30.01 12.06,20.35 9.67,17.96 CN1.5
HSTX18
  Top 0.203: CN1.3 9.28,16.96 12.45,20.13 12.45,29.85 17.58,34.99 24.83,34.99 25.07,34.75 X4.18
HSTX19
  Top 0.203: X4.19 24.67,34.52 24.57,34.61 17.74,34.61 12.83,29.69 12.83,19.97 9.31,16.46 CN1.2
LX
  Top 0.203: X4.63 36.87,25.45 37.73,24.59 L1.P$2
MISO  (via drill 0.4)
  Top 0.203: v23.94,26.29 23.9,26.25 X4.36
  Bottom 0.203: ICSP.1 63.28,30.39 63.28,29.5 62.2,28.42 62.2,28.17 58.93,24.89 38.7,24.89 37.44,26.15 29.34,26.15 28.98,26.52 27.09,26.52 26.35,25.78 24.45,25.78 v23.94,26.29
MISO/SDIO_DAT0  (via drill 0.4)
  Top 0.203: X4.45 25.87,22.57 25.39,22.1 24.42,22.1 23.86,21.54 23.12,21.54 22.16,20.59 22.16,19.52 22.69,18.99 v22.69,18.81 | v61.23,13.53 61.61,13.14 X1.7
  Bottom 0.203: v22.69,18.81 23.11,18.81 23.5,18.43 24.38,18.43 25,19.05 25,19.48 26.98,21.46 57.06,21.46 61.23,17.29 v61.23,13.53
MOSI  (via drill 0.4)
  Top 0.203: X4.39 24.11,25.05 24.25,25.18 27.36,25.18 27.53,25.02 28.54,25.02 v28.54,25.25
  Bottom 0.203: ICSP.4 65.91,27.62 64.96,26.67 61.91,26.67 59.37,24.13 38.35,24.13 37.11,25.38 28.66,25.38 v28.54,25.25
MOSI/SDIO_CMD  (via drill 0.4)
  Top 0.203: X4.44 25.48,23.85 25.64,24.02 25.8,24.02 v26.16,24.38 | v64.01,17.59 66.93,17.59 X1.3
  Bottom 0.203: v26.16,24.38 27.18,23.37 59.91,23.37 63.23,20.05 63.27,20.05 64.01,19.32 v64.01,17.59
N$1
  Top 0.203: L.A 6.55,32.11 R11.2
N$2
  Top 0.203: ON.A 5.91,30.5 R2.2
N$3
  Top 0.406: JP2.1 18.73,17.46 PTC1.1
N$4
  Top 0.406: T1.3 21.02,14.68 PTC1.2
N$5
  Top 0.406: Q1.3 15.06,13.42 R1.2 15.59,13.52 T1.1
N$6
  Top 0.203: D3.A 54.17,41.68 R26.2
N$7
  Top 0.406: IC1.6 29.28,10.52 C30.1
N$8
  Top 0.61: R9.2 28.68,7.43 R12.1 27.31,7.54 IC1.4
N$10
  Top 0.203: R23.1 15.66,27.8 15.6,27.8 | 15.6,27.8 Y1.3 | C27.2 14.49,27.8 15.6,27.8
N$15
  Top 0.61: D1.C 14.75,7.2 T2.2 14.66,8.04 R7.2
NEOPIX  (via drill 0.4)
  Top 0.203: X4.26 21.93,30.25 20.77,31.42 20.77,33.23 v20.64,33.35 | v20.95,40.39 20.9,40.39 LED2.1
  Bottom 0.203: v20.64,33.35 20.57,33.42 20.57,40.01 v20.95,40.39
PSRAM_CS  (via drill 0.4)
  Top 0.203: X4.58 31.07,20.46 v30.86,20.26 | U3.1 59.26,33.35 60.13,32.47 60.13,32.16 R6.1 60.06,32.08 60.82,32.08 61.53,31.37 61.53,24.7 60.77,23.94 56.45,23.94 53.98,21.46 v53.98,19.75
  Bottom 0.203: v30.86,20.26 31.3,19.81 32,19.81 32.38,19.43 53.66,19.43 v53.98,19.75
PWR_SWITCH
  Top 0.203: R7.1 14.46,9.74 T2.1 15.75,9.03 15.75,8.55 17.08,7.21 JP1.1 19.57,7.21 22.19,4.59 SW1.B
PWRIN
  Top 0.61: X5.PWR 11.21,7.62 12.32,6.51 D1.A
QSPI_CS
  Top 0.178: 52.11,40.96 52.11,40.76 R17.1 51.76,40.52 46.9,35.66
  Top 0.203: X4.75 34.44,30.25 34.82,30.63 38.19,30.63 43.31,35.75 46.8,35.75 46.9,35.66 48.13,34.42 U6.1 | 52.11,40.96 52.11,42.04 R26.1
QSPI_DATA[0]
  Top 0.203: X4.72 35.01,29.05 35.41,29.45 39.19,29.45 40.1,30.35 43.62,30.35 44.32,29.66 | U3.5 51.94,28.19 50.42,29.72 44.39,29.72 44.32,29.66 | U6.5 | U6.5 44.32,29.66
QSPI_DATA[1]
  Top 0.203: X4.74 34.63,29.85 35.01,30.23 38.77,30.23 43.85,35.31 45.97,35.31 46.93,34.35 46.93,32.83 46.86,32.77 U6.2 46.86,31.75 47.37,31.24 51.91,31.24 52.63,31.96 52.63,34.66 52.83,34.86 54.1,34.86 54.48,34.48 U3.2
QSPI_DATA[2]
  Top 0.203: X4.73 34.82,29.45 35.2,29.83 38.91,29.83 43.89,34.81 45.09,34.81 45.59,34.3 U6.3 45.59,31.56 46.29,30.86 52.07,30.86 53.15,31.94 53.15,33.29 U3.3
QSPI_DATA[3]
  Top 0.203: X4.70 35.39,28.25 35.83,28.69 39.51,28.69 40.41,29.59 43.02,29.59 43.31,29.31 43.31,24.89 46.42,24.89 46.86,24.89 U6.7 46.86,28.32 47.5,28.96 50.07,28.96 50.86,28.16 50.86,24.96 54.1,24.96 54.1,26.34 U3.7
QSPI_SCK
  Top 0.203: X4.71 35.2,28.65 35.62,29.07 39.35,29.07 40.26,29.97 43.31,29.97 43.69,29.59 43.69,25.34 45.15,25.34 45.59,25.78 U6.6 45.59,28.07 46.86,29.34 50.23,29.34 51.24,28.32 51.24,25.34 53.21,25.34 U3.6
RXD
  Top 0.203: SW4.P1 58.67,42.8 59.75,43.88 59.75,45.53 63.5,49.28 IOL.8
SCK  (via drill 0.4)
  Top 0.203: v27.67,25.84 27.42,25.58 24.05,25.58 23.92,25.45 X4.38
  Bottom 0.203: ICSP.3 62.48,27.05 61.63,27.05 59.09,24.51 38.54,24.51 37.28,25.77 29.07,25.77 28.75,26.09 27.92,26.09 v27.67,25.84
SCK/SDIO_CLK  (via drill 0.4)
  Top 0.203: X4.43 25.07,24.43 v25.05,24.45 | v63.06,14.92 63.48,15.34 X1.5
  Bottom 0.203: v25.05,24.45 24.81,24.45 26.27,22.99 59.24,22.99 62.99,19.24 62.99,14.99 v63.06,14.92
SCL  (via drill 0.4)
  Top 0.203: R13.2 v18.14,44.9 18.14,48.51 | 18.14,48.51 18.14,50.14 IOH.1 | CONN1.4 v6.75,50.32 6.99,50.55 10.54,50.55 12.95,48.13 16.66,48.13 17.04,48.51 18.14,48.51 | X4.21 22.97,32.37 v23.56,32.96 | CN1.20 4.64,25.46 4.22,25.04 3.44,25.04 v2.95,25.53
  Bottom 0.203: v18.14,44.9 20.89,44.9 22.23,43.56 22.23,33.91 23.18,32.96 v23.56,32.96 | v2.95,25.53 3.25,25.83 3.25,26 3.56,26.3 3.56,34.32 1.52,36.35 1.52,39.78 3.56,41.81 3.56,45.75 6.75,48.95 v6.75,50.32
SD_DETECT  (via drill 0.4)
  Top 0.203: X4.49 27.47,22.49 25.93,20.95 24.89,20.95 24.24,20.3 24.24,19.49 v23.94,19.49 | v59.5,20.64 59.5,21.05 X1.9
  Bottom 0.203: v23.94,19.49 26.67,22.23 57.53,22.23 59.12,20.64 v59.5,20.64
SDA  (via drill 0.4, 0.48)
  Top 0.203: R10.2 22.54,45.82 | 22.54,45.82 21.74,45.82 21.21,46.35 21.21,50.67 IOH.2 | CONN1.3 7.75,49.41 v8,49.66 10.67,49.66 12.6,47.73 17.27,47.73 v17.34,47.79 | X4.20 23.88,33.92 v23.3,33.92 | v22.54,44.51 22.54,45.82 | CN1.21 4.18,25.96 v3.94,25.72
  Bottom 0.203: v17.34,47.79 19.47,47.79 21.34,49.66 IOH.2 | v23.3,33.92 22.61,34.62 22.61,44.45 v22.54,44.51 | v3.94,25.72 3.94,34.48 1.91,36.51 1.91,39.62 3.94,41.66 3.94,45.59 v8,49.66
SDCS/SDIO_DAT3  (via drill 0.4)
  Top 0.203: X4.48 27.07,24.38 v27.18,24.38 | X1.2 66.89,18.73 v65.09,18.73 63.06,18.73 61.21,16.89 R3.1
  Bottom 0.203: v27.18,24.38 27.18,24.19 27.62,23.75 61.59,23.75 65.09,20.26 v65.09,18.73
SDIO_DAT1  (via drill 0.4)
  Top 0.203: X4.46 26.27,22.37 25.62,21.72 24.57,21.72 24.02,21.16 23.27,21.16 22.85,20.73 v22.85,19.8 | v61.91,12.13 66.94,12.13 X1.8
  Bottom 0.203: v61.91,12.13 61.91,17.14 57.21,21.84 26.83,21.84 24.62,19.64 24.62,19.21 24.22,18.81 23.66,18.81 22.85,19.62 v22.85,19.8 | v22.85,19.8
SDIO_DAT2  (via drill 0.4)
  Top 0.203: X4.47 26.67,22.23 25.77,21.34 24.74,21.34 23.88,20.48 v23.56,20.48 | v61.66,19.37 62.03,19.74 X1.1
  Bottom 0.203: v23.56,20.48 24.38,20.48 26.51,22.61 58.61,22.61 61.66,19.56 v61.66,19.37
SW
  Top 0.406: IC1.2 28.26,12.51 29.08,11.68 30.07,11.68 C30.2
  Top 0.61: C30.2 33.04,12.22 L2.P$1
SWCLK  (via drill 0.4)
  Top 0.203: v25.7,27.19 25.45,27.45 X4.33 | v41.78,26.56 42.04,26.56 42.42,26.18 42.42,23.46 47.62,18.26 49.13,18.26 49.51,17.88 DEBUG.1
  Bottom 0.203: v25.7,27.19 26.69,27.19 26.77,27.28 29.36,27.28 29.72,26.92 37.76,26.92 39.02,25.65 40.62,25.65 41.53,26.56 v41.78,26.56
SWDIO  (via drill 0.4)
  Top 0.203: v25.02,26.48 24.45,27.05 X4.34 | v41.72,25.57 41.72,23.62 47.51,17.83 DEBUG.3
  Bottom 0.203: v25.02,26.48 26.51,26.48 26.93,26.9 29.2,26.9 29.57,26.54 37.6,26.54 38.86,25.27 41.42,25.27 v41.72,25.57
TXD
  Top 0.203: SW4.P2 58.67,46.04 60.96,48.32 IOL.7
USB_D+  (via drill 0.4)
  Top 0.203: 7.43,37.35 X3.B6 5.22,37.35 v5.02,37.15 | 7.43,37.35 7.96,37.35 R25.1 | X3.A6 7.24,38.35 7.43,38.16 7.43,37.35
  Bottom 0.203: v5.02,37.15 2.92,37.15 D+1.TP
USB_D-  (via drill 0.4)
  Top 0.203: R24.1 7.99,38.85 X3.B7 5.64,38.85 5.46,38.67 | X3.A7 5.52,37.85 5.46,37.91 5.46,38.67 | 5.46,38.67 5.02,39.12 v4.92,39.12
  Bottom 0.203: v4.92,39.12 3.05,39.12 D-1.TP
USBBOOT  (via drill 0.4, 0.48)
  Top 0.203: 60.33,37.27 55.18,37.27 D3.C | 60.33,37.27 62.04,37.27 63.36,38.6 SW3.1 | X4.25 23.8,30.65 v24.08,30.36 | v60.26,37.19 60.26,37.21 60.33,37.27
  Bottom 0.203: v24.08,30.36 25.7,31.98 25.7,32.85 25.4,33.15 25.4,40.95 29.34,44.9 56.07,44.9 60.33,40.64 TP1.P$1 60.96,37.88 v60.26,37.19
USBH_D+
  Top 0.203: X4.40 21.47,24.65 18.41,21.59 JP2.3 17.44,21.59 R15.2
USBH_D-
  Top 0.203: X4.42 24.66,23.36 24.66,23.85 24.57,23.94 24.35,24.16 21.52,24.16 18.95,21.59 18.95,21.11 17.78,19.94 JP2.2 17.55,19.05 R14.2
USBH_PWR
  Top 0.203: X4.37 22.1,25.85 19.05,22.8 15.88,22.8 14.8,21.72 14.8,20.19 12.02,17.41 12.02,15.22 R8.2 11.79,13.56 Q1.1
VBUS
  Top 0.305: X3.B4A9 6,35.7 5.76,35.94 5.08,35.94 4.19,36.83 4.19,39.69 4.76,40.26 5.76,40.26 6,40.5 X3.A4B9
  Top 0.508: X3.A4B9 7.29,40.5 7.75,40.95 11.05,40.95 C5.2 13.34,41.53 D2.A 14.88,41.4 C7.1
VIN
  Top 0.406: IC1.3 27.31,12.57 28.26,11.62 IC1.5
  Top 0.61: PC3.+ 24.02,14.92 26.99,14.92 C31.2 IC1.3 | C29.1 28.26,9.5 IC1.5
  Top 0.813: POWER.8 45.72,4 43.88,5.84 25.08,5.84 24.7,6.22 22.16,6.22 19.37,9.02 | 19.37,9.02 19.43,9.02 19.47,8.98 23.11,12.62 PC3.+ | T2.3 19.3,9.08 19.37,9.02
VREG_AVDD
  Top 0.203: X4.61 34.52,23.3 C4.1 34.46,23.18 R5.2
XIN
  Top 0.203: X4.30 21.82,28.65 21.44,28.27 18.2,28.27 Y1.1 17.34,30.39 C26.2
XOUT
  Top 0.203: X4.31 22.02,28.25 21.63,27.87 18.62,27.87 R23.2

## Text on the board
tNames: SCL | SDA | AREF | GND | 1 | ANALOG IN | IOREF | RESET | 3V3 | 5V | GND | VIN | A0 | A1 | A2 | A3 | A4 | A5
Pinguin_tBackup: 23 | 22 | #23 | RP2350 | 6- / 20V | DC | In
214bmp: D:/SmartProjects/Snc/a4_bn_logo2.bmp